# Altium PCB PCB.PcbDoc
Units mm, origin at the board's own origin, x right, y up, seen from the top; angles counter-clockwise.
Board outline 19.22 x 25.43 mm, 2 copper layers (Top Layer, Bottom Layer), stack 1.57 mm thick; 4 components, 12 nets, 66 pads, 33 vias.
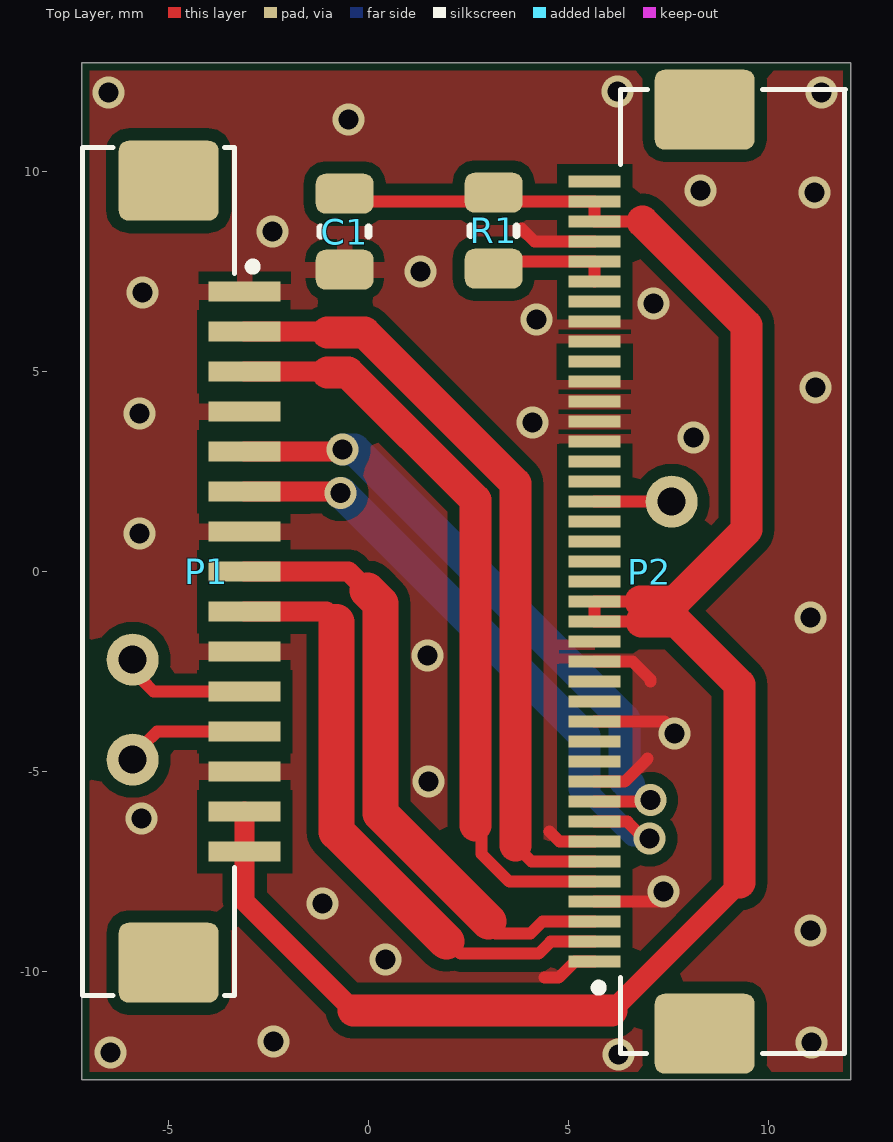
[diagram p0: Top Layer view]
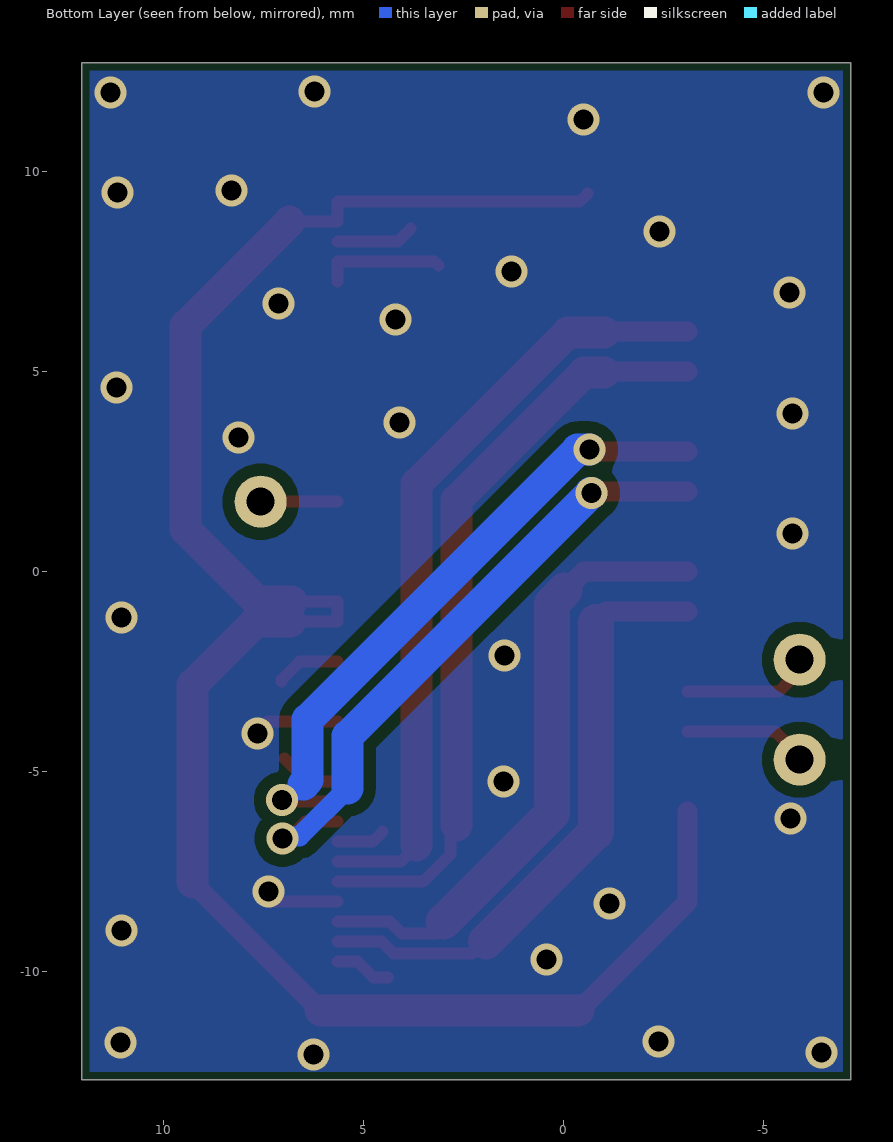
[diagram p1: Bottom Layer view, seen from below]
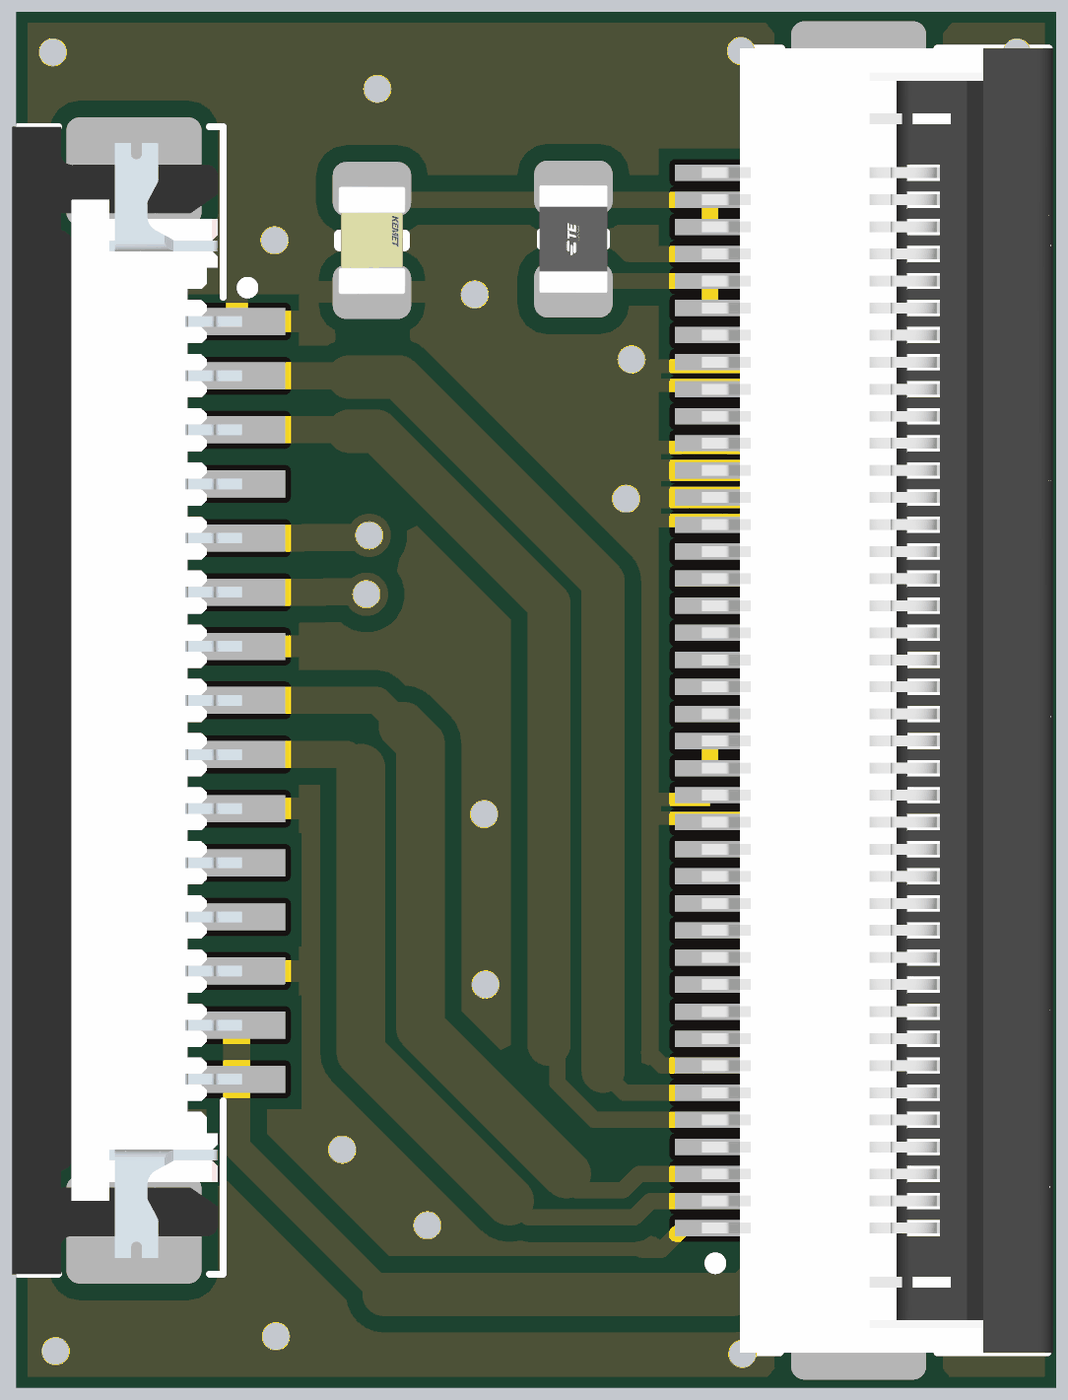
[diagram p2: 3D render of the assembled board from above, using the file's embedded part models]

## Layer stack, top to bottom
Top Solder: solder mask 0.015, Solder Resist, Dk 3.5
Top Layer: signal copper 0.035
Dielectric 1: dielectric 1.5, FR-4, Dk 4.2
Bottom Layer: signal copper 0.035
Bottom Solder: solder mask 0.015, Solder Resist, Dk 3.5

## Board outline
-7.175,-12.7 -7.175,12.725 12.05,12.725 12.05,-12.7

## Design rules (kind name [scope] priority, off if disabled: settings)
BoardOutlineClearance [All] p1: gap=0.2 ignorepadtopadclearanceinfootprint=FALSE
Clearance Clearance_Polygon_Fiducials [All vs InComponent('FID?')] p1: gap=1.3 ignorepadtopadclearanceinfootprint=FALSE
Clearance Clearance_Polygon [InPolygon] p2: gap=0.3 ignorepadtopadclearanceinfootprint=FALSE
Clearance [All] p3: gap=0.15 ignorepadtopadclearanceinfootprint=FALSE except(0: Arc-Hole Track-Hole SMDPad-Hole THPad-Hole Via-Hole Fill-Hole Poly-Hole Region-Hole Text-Hole)
DiffPairsRouting [All] p1: maxlimit=0.3 minlimit=0.2 mostfreqgap=0.2 toplayer_minwidth=0.3 toplayer_maxwidth=1 toplayer_prefwidth=0.8 bottomlayer_minwidth=0.3 bottomlayer_maxwidth=1 bottomlayer_prefwidth=0.8 maxuncoupledlength=12.7
HoleSize [All] p1: absolutevalues=TRUE maxlimit=3.5 minlimit=0.3 maxpercent=80.000 minpercent=20.000
MinimumSolderMaskSliver [All] p1: minsoldermaskwidth=0.15
PolygonConnect PolygonConnect_Via [IsVia] p1: connectstyle=Direct reliefconductorwidth=0.4 reliefentries=4 polygonreliefangle="90 Angle" airgapwidth=0.25
PolygonConnect [All] p2: connectstyle=Relief reliefconductorwidth=0.4 reliefentries=4 polygonreliefangle="90 Angle" airgapwidth=0.25
RoutingVias [All] p1: holewidth=0.4 width=0.7 viastyle="Through Hole" minholewidth=0.4 minwidth=0.6 maxholewidth=2 maxwidth=3
SilkToSilkClearance [All] p1: silktosilkclearance=0.15
SilkToSolderMaskClearance [IsPad] p1: minsilkscreentomaskgap=0.1 clearancetoexposedcopper=TRUE
SolderMaskExpansion SolderMaskExpansion_Via [IsVia] p1: expansion=0.102 istentingtop=TRUE soldermaskfromhole=TRUE
SolderMaskExpansion [All] p2: expansion=0.102 istentingtop=FALSE
Width [All] p1: maxlimit=2 minlimit=0.25 preferedwidth=0.3
25 further rules are at their usual default settings.

## Classes and differential pairs
differential pair class MIPI: C D0 D1
differential pair D1: +D1_P -D1_N
differential pair D0: +D0_P -D0_N
differential pair C: +C_P -C_N

## Components (designator, comment, footprint, x,y, rotation, side; value= is the part's Value field where it differs from the comment)
C1 "CC0805KRX7R9BB104" C0805 -0.6,8.5 r270 top value=100nF_50V
P1 "686115183522" 686115183522 -5,0 r270 top
P2 "687140149022" 687140149022 5.65,0 r90 top
R1 "AC0805FR-07100RL" R0805 3.125,8.525 r90 top value=100

## Footprints (in the part's own frame and the unit in brackets; to place one, negate y for a bottom-side part, rotate by r counter-clockwise, add the part's x,y. Pads: shape width x height; smd on the part's side, far side on the other; paste and mask are expansions set on the pad)
686115183522 [mm]
  rect 0.5x1.8 smd: 1(-7,1.9) 2(-6,1.9) 3(-5,1.9) 4(-4,1.9) 5(-3,1.9) 6(-2,1.9) 7(-1,1.9) 8(0,1.9) 9(1,1.9) 10(2,1.9) 11(3,1.9) 12(4,1.9) 13(5,1.9) 14(6,1.9) 15(7,1.9)
  rrect25% 2x2.5 smd mask+0: MP1(-9.775,0) MP2(9.775,0)
  silkscreen extent -10.6,-2.15 10.6,2.2, body extent -10.6,-2.25 10.6,2, height 1.2
687140149022 [mm]
  rect 0.3x1.3 smd: 1(-9.75,0) 2(-9.25,0) 3(-8.75,0) 4(-8.25,0) 5(-7.75,0) 6(-7.25,0) 7(-6.75,0) 8(-6.25,0) 9(-5.75,0) 10(-5.25,0) 11(-4.75,0) 12(-4.25,0) 13(-3.75,0) 14(-3.25,0) 15(-2.75,0) 16(-2.25,0) 17(-1.75,0) 18(-1.25,0) 19(-0.75,0) 20(-0.25,0) 21(0.25,0) 22(0.75,0) 23(1.25,0) 24(1.75,0) 25(2.25,0) 26(2.75,0) 27(3.25,0) 28(3.75,0) 29(4.25,0) 30(4.75,0) 31(5.25,0) 32(5.75,0) 33(6.25,0) 34(6.75,0) 35(7.25,0) 36(7.75,0) 37(8.25,0) 38(8.75,0) 39(9.25,0) 40(9.75,0)
  rrect25% 2x2.5 smd mask+0: MP1(-11.55,-2.75) MP2(11.55,-2.75)
  silkscreen extent -12.05,-6.27 12.05,0, body extent -12.05,-6.35 12.05,0.15, height 2.2
C0805 [mm] "FP-C0805C-DN-MFG"
  rrect50% 1x1.45 smd paste+0 mask+0: 1(-0.95,0) 2(0.95,0)
  silkscreen extent -0.1,-0.6 0.1,0.6, body extent -1.4,-0.85 1.4,0.85, height 0.25
R0805 [mm] "FP-CRG0805-IPC_C"
  rrect50% 1x1.45 smd paste+0 mask+0: 1(-0.95,0) 2(0.95,0)
  silkscreen extent -0.11,-0.58 0.11,0.58, body extent -1.33,-0.8 1.33,0.8, height 0.25

## Part data
C1: library part CAPACITOR, "50V 100nF X7R ±10% 0805 Multilayer Ceramic Capacitors MLCC - SMD/SMT ROHS", Manufacturer=YAGEO, Package=0805, Category=Capacitor, ComponentLink2Description=Datasheet, ComponentLink2URL=https://content.kemet.com/datasheets/KEM_C1003_C0G_SMD.pdf, Mounting=SMD
P1: library part CON-FPC-1MM-15P-RA, "15 Position FFC, FPC Connector Contacts, Bottom 1.0mm Surface Mount, Right Angle"
P2: library part CON-FPC-0.5MM-40P-RA, "40 Position FFC, FPC Connector Contacts, Bottom 0.020 (0.50mm) Surface Mount, Right Angle"
R1: library part RESISTOR, "125mW Thick Film Resistors 150V ±100ppm/℃ ±1% -55℃~+155℃ 100Ω 0805 Chip Resistor - Surface Mount ROHS", Manufacturer=YAGEO, Package=0805, Category=Resistor, Mounting=SMD

## Free pads (board coordinates)
  round 1.3 hole 0.7: 0(-5.9,-2.2) 1(-5.9,-4.7) 2(7.575,1.75)

## Via types
v1: diameter 0.8, hole 0.5, Top Layer to Bottom Layer, tented both sides, 33 vias

## Nets (pads, with @x,y where several pads share a name; then routed paths per layer and width w, separated by ;. In a path a pad name is that pad's centre, name@x,y a point inside that pad or via, vN(x,y) a via of type N, cw(c..) or ccw(c..) an arc to the next point about the centre after c; other vN are vias at no path point)
C_N: P1.5 P2.9 | length 16.1
  Top Layer w0.3: P2.9 6.996,-5.75 v1(7.04,-5.706)
  Top Layer w0.5: P1.5 -1.889,3 -1.883,3.006 -0.694,3.006 v1(-0.65,3.05)
  Bottom Layer w0.5: 6.506,-5.319 6.572,-5.319 6.959,-5.706 v1(7.04,-5.706)
  Bottom Layer w0.8: v1(-0.65,3.05) -0.35,3.05 6.4,-3.7 6.4,-5.213 6.506,-5.319
C_P: P1.6 P2.8 | length 16
  Top Layer w0.3: P2.8 6.465,-6.25 6.89,-6.675 v1(7.025,-6.675)
  Top Layer w0.5: P1.6 -1.475,2 -1.469,2.006 -0.745,2.006 v1(-0.701,1.962)
  Bottom Layer w0.5: 5.4,-5.415 6.603,-6.618 6.968,-6.618 v1(7.025,-6.675)
  Bottom Layer w0.8: v1(-0.701,1.962) -0.676,1.962 5.4,-4.114 5.4,-5.415
D0_N: P1.8 P2.3 | length 15.8
  Top Layer w0.3: 3,-8.75 3,-8.874 3.176,-9.05 4.043,-9.05 4.343,-8.75 P2.3
  Top Layer w0.5: P1.8 -0.5,0 -0.025,-0.475
  Top Layer w0.9: -0.025,-0.475 0.297,-0.797 0.297,-6.047 3,-8.75
D0_P: P1.9 P2.2 | length 15.5
  Top Layer w0.3: 1.944,-9.25 1.994,-9.25 2.294,-9.55 4.25,-9.55 4.55,-9.25 P2.2
  Top Layer w0.5: P1.9 -1.056,-1 -0.803,-1.253
  Top Layer w0.9: -0.803,-1.253 -0.803,-6.503 1.944,-9.25
D1_N: P1.2 P2.6 | length 19.5
  Top Layer w0.3: 3.675,-6.85 4.075,-7.25 P2.6
  Top Layer w0.5: P1.2 -1.05,6 -1.025,5.975
  Top Layer w0.8: -1.025,5.975 -0.1,5.975 3.675,2.2 3.675,-6.85
D1_P: P1.3 P2.5 | length 19.1
  Top Layer w0.3: 2.675,-6.35 2.825,-6.5 2.825,-7.061 3.514,-7.75 P2.5
  Top Layer w0.5: P1.3 -1.05,5 -1.025,4.975
  Top Layer w0.8: -1.025,4.975 -0.514,4.975 2.675,1.786 2.675,-6.35
GND: C1.2 P1.1 P1.4 P1.7 P1.10 P1.13 P2.1 P2.4 P2.7 P2.10 P2.13 P2.16 P2.17 P2.27 P2.28 P2.29 P2.30 P2.32 P2.33 P2.37 | length 11.4
  Top Layer w0.3: 3.825,8.575 4.15,8.25 P2.37 ; 4.391,-10.15 4.75,-10.15 5.15,-9.75 P2.1 ; 4.525,-6.5 4.775,-6.75 P2.7 ; P2.4 7.3,-8.25 v1@7.35,-8.2 ; P2.10 6.4,-5.25 6.975,-4.675 ; P2.13 7.4,-3.75 v1@7.475,-3.825 ; P2.16 6.6,-2.25 7.05,-2.7 7.05,-2.75
  other v1: 6.25,-12.075 -6.45,-12.025 11.075,-11.775 -2.375,-11.75 0.425,-9.7 11.05,-8.975 -1.15,-8.3 7.375,-8 -5.675,-6.175 1.5,-5.25 7.65,-4.05 1.475,-2.1 11.05,-1.15 -5.725,0.95 8.125,3.35 4.1,3.725 -5.725,3.95 11.175,4.6 4.2,6.3 7.125,6.7 -5.65,6.975 1.3,7.5 -2.4,8.5 11.15,9.475 8.3,9.525 -0.5,11.3 -6.5,11.975 11.325,11.975 6.225,12
IOVCC: C1.1 P1.14 P1.15 P2.18 P2.19 P2.38 P2.39 R1.2 | length 48.2
  Top Layer w0.3: C1.1 -0.4,9.25 3.125,9.25 P2.39 P2.38 6.85,8.75 ; 6.8,-0.75 P2.19 P2.18 6.825,-1.25
  Top Layer w0.5: P1.14 P1.15 -3.1,-8.25 -0.375,-10.975 ; 6.075,-10.975 9.275,-7.775
  Top Layer w0.8: -0.375,-10.975 6.075,-10.975 ; 6.8,-0.75 7.65,-0.75 9.45,1.05 9.45,6.15 6.85,8.75 ; 6.825,-1.25 7.7,-1.25 9.275,-2.825 9.275,-7.775
LEDA: P2.35 P2.36 R1.1 | length 3.1
  Top Layer w0.3: R1.1@3.125,7.65 3.225,7.75 P2.36 P2.35
RESET: P2.24 pad.2 | length 1.6
  Top Layer w0.3: P2.24 7.2,1.75 pad.2@7.219,1.731
SCL: P1.11 pad.0 | length 2.9
  Top Layer w0.3: pad.0@-5.826,-2.548 -5.822,-2.548 -5.56,-2.811 -5.56,-2.815 -5.375,-3 P1.11
SDA: P1.12 pad.1 | length 2.7
  Top Layer w0.3: pad.1@-5.675,-4.328 -5.621,-4.328 -5.293,-4 P1.12
pads on no net: P1.MP1 P1.MP2 P2.11 P2.12 P2.14 P2.15 P2.20 P2.21 P2.22 P2.23 P2.25 P2.26 P2.31 P2.34 P2.40 P2.MP1 P2.MP2

## Polygon pours and split planes (outlines as drawn)
GND on Bottom Layer "NONET_L-01_P-001" (solid, remove dead copper, pour order 1): -7.175,-12.7 12.05,-12.7 12.05,12.725 -7.175,12.725
GND on Top Layer "NONET_L-01_P-001" (solid, remove dead copper, pour order 0): -7.175,-12.7 12.05,-12.7 12.05,12.725 -7.175,12.725

## Silkscreen, mask and mechanical layers (free items; w line width, h text height)
Mechanical 1:
  the board outline again, w0.2